# Altium PCB car_PCB.PcbDoc
Units mm, origin at the board's own origin, x right, y up, seen from the top; angles counter-clockwise.
Board outline 95 x 85 mm, 2 copper layers (Top Layer, Bottom Layer); 16 components, 24 nets, 116 pads, 31 vias.
Unrouted connection lines stored in the file: 53.
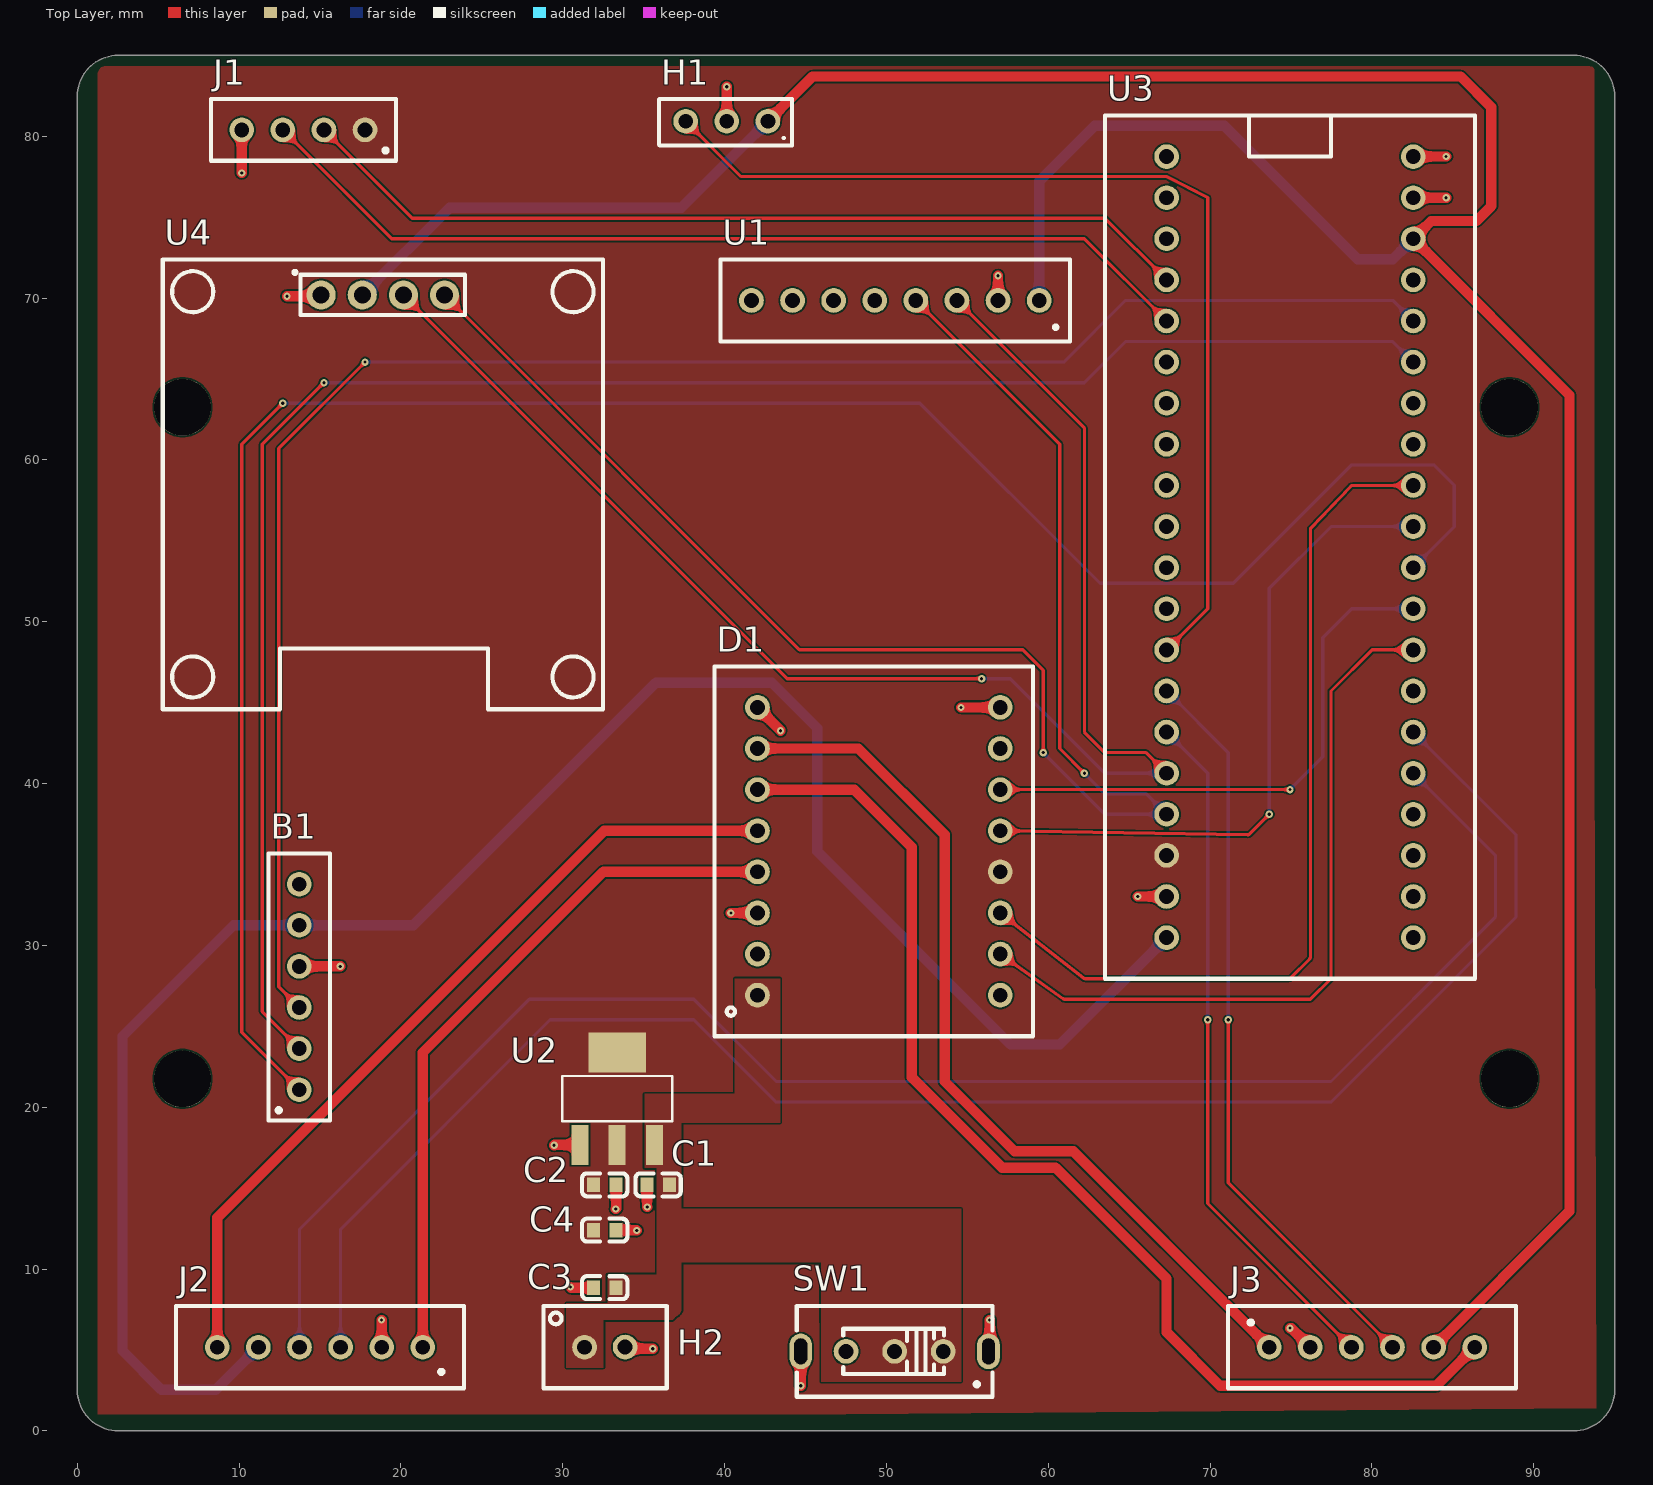
[diagram p0: Top Layer view]
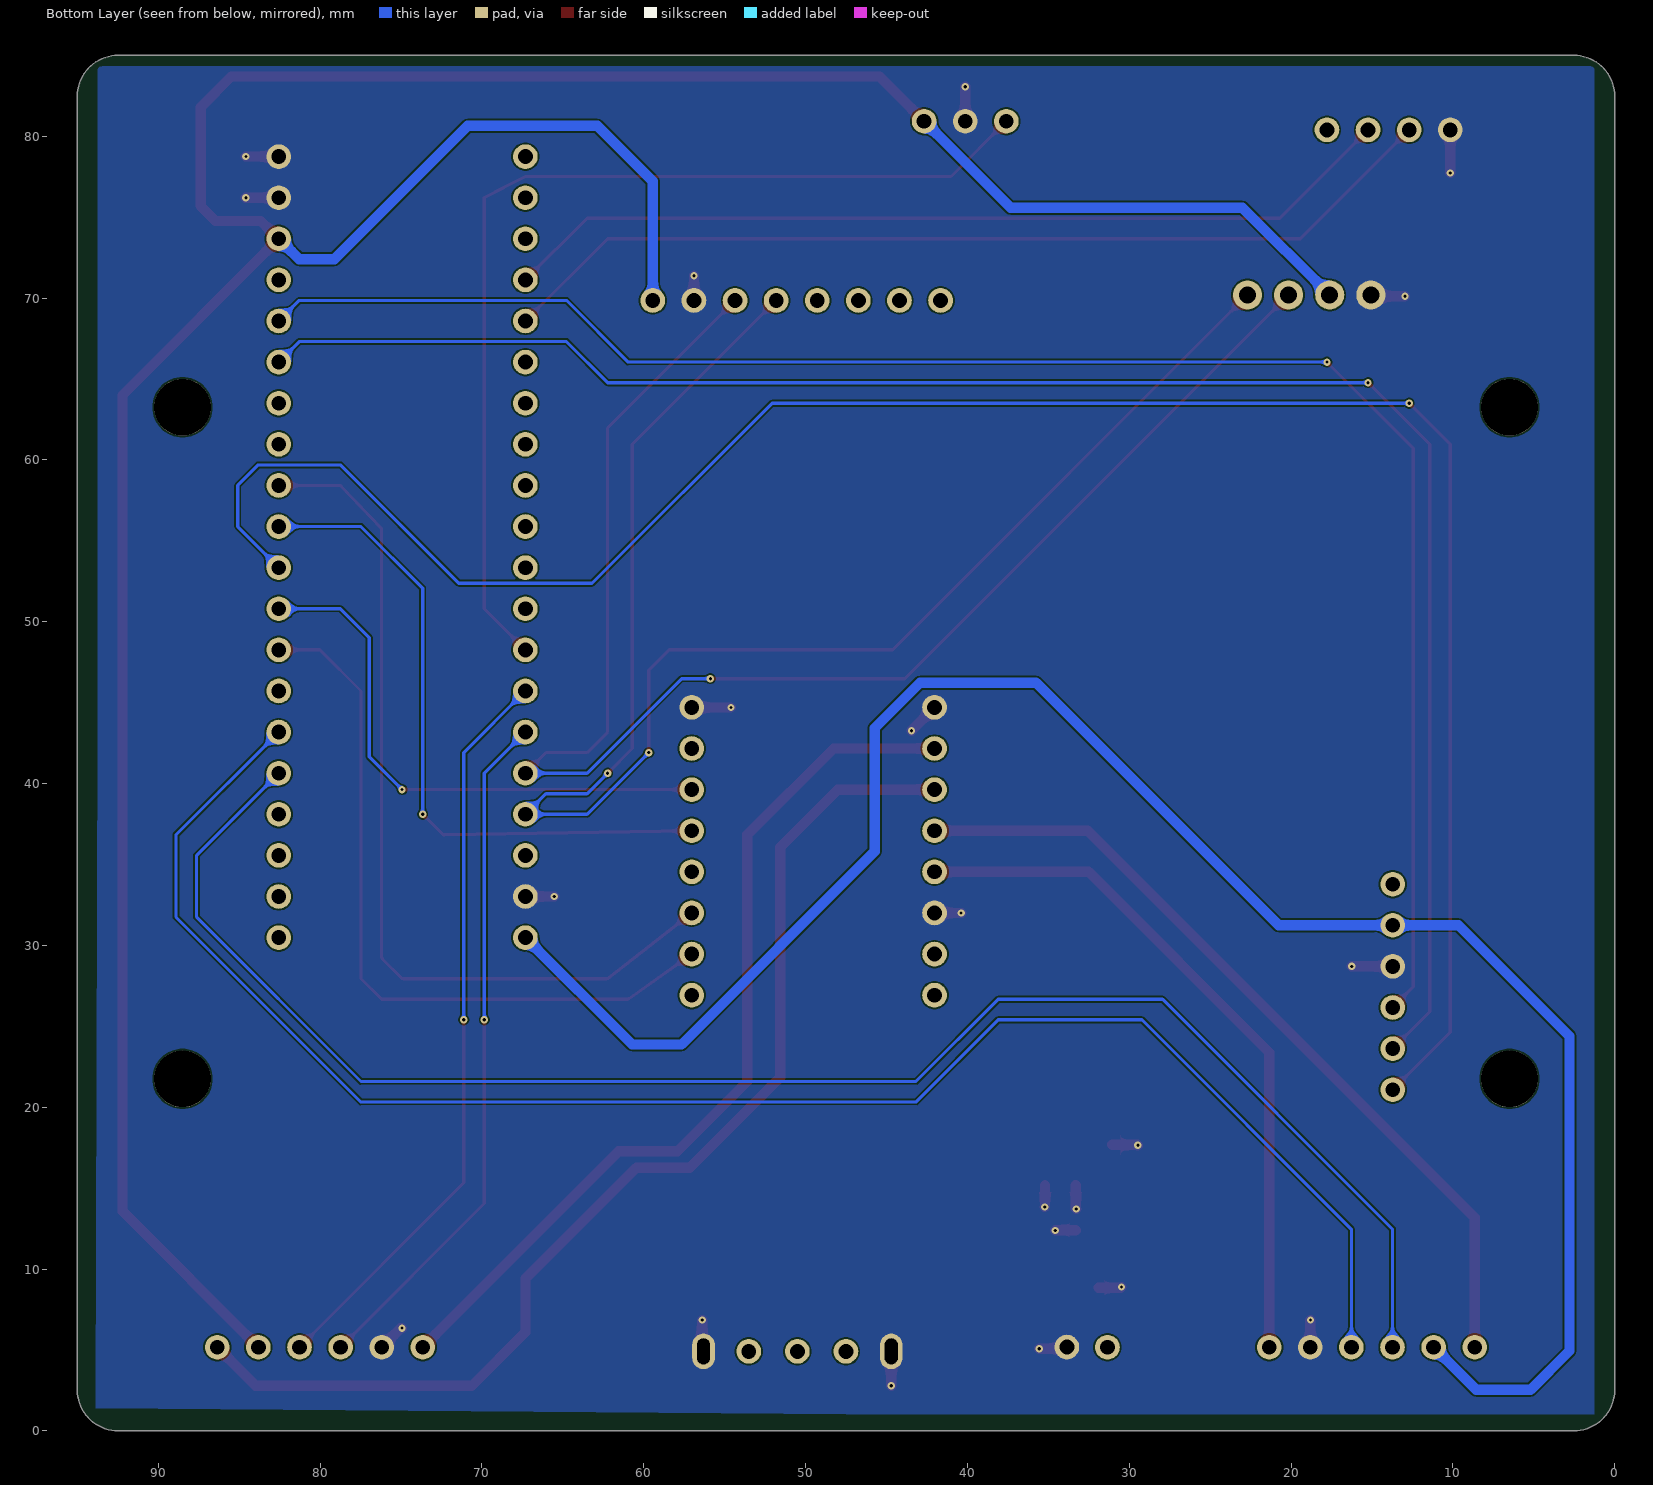
[diagram p1: Bottom Layer view, seen from below]

## Layer stack, top to bottom
Top Solder: solder mask 0.0102, Solder Resist, Dk 3.5
Top Layer: signal copper 0.0356
Dielectric 1: dielectric 0.32, FR-4, Dk 4.8
Bottom Layer: signal copper 0.0356
Bottom Solder: solder mask 0.0102, Solder Resist, Dk 3.5

## Board outline
0,2.54 0,82.46 cw(c2.54,82.46) 2.54,85 92.46,85 cw(c92.46,82.46) 95,82.46 95,2.54 cw(c92.46,2.54) 92.46,0 2.54,0 cw(c2.54,2.54)

## Design rules (kind name [scope] priority, off if disabled: settings)
Clearance PWR_Clearance [InNetClass('PWR')] p1: gap=0.102 ignorepadtopadclearanceinfootprint=FALSE
Clearance [All] p2: gap=0.102 ignorepadtopadclearanceinfootprint=FALSE
DiffPairsRouting [All] p1: maxlimit=1 minlimit=0.1 mostfreqgap=0.1 toplayer_minwidth=0.1 toplayer_maxwidth=1 toplayer_prefwidth=0.1 bottomlayer_minwidth=0.1 bottomlayer_maxwidth=1 bottomlayer_prefwidth=0.1 maxuncoupledlength=12.7
HoleSize [All] p1: absolutevalues=TRUE maxlimit=3.81 minlimit=0.025 maxpercent=80.000 minpercent=20.000
HoleToHoleClearance [All] p1: gap=0.102 allowstackedmicrovias=TRUE
PolygonConnect [All] p1: connectstyle=Direct reliefconductorwidth=0.254 reliefentries=4 polygonreliefangle="90 Angle" airgapwidth=0.254
RoutingVias [All] p1: holewidth=0.2 width=0.45 viastyle="Through Hole" minholewidth=0.2 minwidth=0.45 maxholewidth=1 maxwidth=2
SilkToSilkClearance [All] p1: silktosilkclearance=0.102
SilkToSolderMaskClearance [IsPad] p1: minsilkscreentomaskgap=0.102 clearancetoexposedcopper=TRUE
SolderMaskExpansion [All] p1: expansion=0.102 istentingtop=FALSE
Width BIG_POWER [InNetClass('BIG_POWER')] p1: maxlimit=8 minlimit=0.254 preferedwidth=0.889
Width PWR [InNetClass('PWR')] p2: maxlimit=2.5 minlimit=0.508 preferedwidth=0.635
Width [All] p3: maxlimit=2 minlimit=0.1 preferedwidth=0.2
25 further rules are at their usual default settings.

## Classes and differential pairs
net class BIG_POWER: VBAT
net class PWR: +3.3V +5V AO1 AO2 BO1 BO2 GND
component class car_schematic: B1 C1 C2 C3 C4 D1 H1 H2 J1 J2 J3 SW1 U1 U2 U4

## Components (designator, comment, footprint, x,y, rotation, side; value= is the part's Value field where it differs from the comment)
B1 "HC-05" HC-05_HEADER 13.716,27.432 r90 top
C1 "0.1uF" C0603 35.899,15.198 r0 top value=1uF
C2 "0.1uF" C0603 32.597,15.198 r0 top value=1uF
C3 "10uF" C0603 32.597,8.848 r0 top value=1uF
C4 "10uF" C0603 32.597,12.404 r0 top value=1uF
D1 "DRV8833" DRV8833_HEADER 49.53,35.814 r90 top
H1 "infrared" RISYM-001_HEADER 40.132,80.924 r180 top
H2 "HEADER_1X2" HEADER_1X2 32.597,5.175 r0 top
J1 "ultrasonic" HC-SR04_HEADER 13.97,80.391 r180 top
J2 "JGA25-370" JGA25-370_HEADER 15,5.171 r180 top
J3 "JGA25-370" JGA25-370_HEADER 80,5.171 r0 top
SW1 "SS-12F44-G5_C136718" SW-TH_SS-12F44-GX 50.504,4.911 r180 top
U1 "MPU-6050" MPU-6050_HEADER 50.546,69.85 r180 top
U2 "AMS1117-ADJ_C369939" SOT-223_L6.5-W3.5-P2.30-LS7.0-BR 33.359,20.532 r270 top
U3 "STM32F103C8T6_HEADER" STM32F103C8T6_HEADER 74.93,54.61 r270 top
U4 "HS96L03W2C03" OLED-TH_L27.8-W27.2-P2.54_C9900033791 18.881,70.19 r0 top

## Footprints (in the part's own frame and the unit in brackets; to place one, negate y for a bottom-side part, rotate by r counter-clockwise, add the part's x,y. Pads: shape width x height; smd on the part's side, far side on the other; paste and mask are expansions set on the pad)
C0603 [mm]
  rect 0.8x0.9 smd paste+0 mask+0.051: 1(-0.7,0) 2(0.7,0)
  silkscreen extent -1.41,-0.71 1.39,0.72
DRV8833_HEADER [mil] "电机驱动"
  round 60 hole 36 paste+0 mask+4: 1(-350,295.3) 2(-250,295.3) 3(-150,295.3) 4(-50,295.3) 5(50,295.3) 6(150,295.3) 7(250,295.3) 8(350,295.3) 9(350,-295.3) 10(250,-295.3) 11(150,-295.3) 12(50,-295.3) 13(-50,-295.3) 14(-150,-295.3) 15(-250,-295.3) 16(-350,-295.3)
  silkscreen extent -450,-375 450,400
HC-05_HEADER [mil] "蓝牙"
  round 60 hole 36 paste+0 mask+4: 1(-250,0) 2(-150,0) 3(-50,0) 4(50,0) 5(150,0) 6(250,0)
  silkscreen extent -325,-75 325,75
HC-SR04_HEADER [mil] "超声波模块"
  round 60 hole 36 paste+0 mask+4: 1(-150,0) 2(-50,0) 3(50,0) 4(150,0)
  silkscreen extent -225,-75 225,75
HEADER_1X2 [mil] "HEADER"
  round 60 hole 36 paste+0 mask+4: 1(-49.33,-0.14) 2(49.33,0.14)
  silkscreen extent -149,-100 151,100
JGA25-370_HEADER [mil] "直流减速电机"
  round 60 hole 36 paste+0 mask+4: 1(-250,0) 2(-150,0) 3(-50,0) 4(50,0) 5(150,0) 6(250,0)
  silkscreen extent -350,-100 350,100
MPU-6050_HEADER [mil]
  round 60 hole 36 paste+0 mask+4: 1(-350,0) 2(-250,0) 3(-150,0) 4(-50,0) 5(50,0) 6(150,0) 7(250,0) 8(350,0)
  silkscreen extent -425,-100 425,100
OLED-TH_L27.8-W27.2-P2.54_C9900033791 [mm]
  round 1.8 hole 1.05 paste+0 mask+0.05: 1(-3.81,0) 2(-1.27,0) 3(1.27,0) 4(3.81,0)
  silkscreen extent -13.6,-25.6 13.6,2.2
RISYM-001_HEADER [mil] "红外循迹"
  round 60 hole 36 paste+0 mask+4: 1(-100,0) 2(0,0) 3(100,0)
  silkscreen extent -159,-54 165,59
SOT-223_L6.5-W3.5-P2.30-LS7.0-BR [mm]
  rect 2.465x1.05 smd paste+0 mask+0.051: 1(2.858,-2.3) 2(2.857,0) 3(2.857,2.3)
  rect 2.465x3.54 smd paste+0 mask+0.051: 4(-2.857,0)
  silkscreen extent -1.4,-3.4 1.4,3.4
STM32F103C8T6_HEADER [mil]
  round 60 hole 36 paste+0 mask+4: 1(-950,300) 2(-850,300) 3(-750,300) 4(-650,300) 5(-550,300) 6(-450,300) 7(-350,300) 8(-250,300) 9(-150,300) 10(-50,300) 11(50,300) 12(150,300) 13(250,300) 14(350,300) 15(450,300) 16(550,300) 17(650,300) 18(750,300) 19(850,300) 20(950,300) 21(950,-300) 22(850,-300) 23(750,-300) 24(650,-300) 25(550,-300) 26(450,-300) 27(350,-300) 28(250,-300) 29(150,-300) 30(50,-300) 31(-50,-300) 32(-150,-300) 33(-250,-300) 34(-350,-300) 35(-450,-300) 36(-550,-300) 37(-650,-300) 38(-750,-300) 39(-850,-300) 40(-950,-300)
  silkscreen extent -1050,-450 1050,450
SW-TH_SS-12F44-GX [mil]
  round 60 hole 36 paste+0 mask+2: 1(-118.11,0) 2(0,0) 3(118.11,0)
  oval 55.12x86.61 hole 31.5 slot 62.99 at 90 deg paste+0 mask+2: 4(228.35,0) 5(-228.35,0)
  silkscreen extent -238,-110 238,110

## Part data
B1: "蓝牙模块 VCC接3.3"
C1 C2 C3 C4: library part C0603, JLCPCB Part Class="Basic Part", LCSC Part Name="1uF ±10% 50V", Manufacturer=SAMSUNG(三星), Manufacturer Part=CL10A105KB8NNNC, Temperature Coefficient=X5R, Tolerance=±10%, Voltage Rated=50V, Add into BOM=yes, Convert to PCB=yes, Datasheet=https://atta.szlcsc.com/upload/public/pdf/source/20160103/1457707679084.pdf, Device=CL10A105KB8NNNC, Name=1uF, Supplier=LCSC, Supplier Footprint=0603, Supplier Part=C15849, Symbol=CL10A105KB8NNNC
D1: "电机驱动"
H1: library part RISYM-001, "红外循迹模块"
J1: library part HC-SR04, "超声波模块 Pin Header"
J2 J3: "JGA25-370 直流减速电机"
SW1: "滑动开关G5", Current Rating (AC)=-, JLCPCB Part Class="Extended Part", LCSC Part Name="直插双档 滑动开关", Manufacturer=韩国韩荣, Manufacturer Part=SS-12F44-G5, Operating Temperature=-25℃~+70℃, Actuator Style=矩形柱状, Add into BOM=yes, Circuit=单刀双掷, Convert to PCB=yes, Current Rating (DC)=-, Datasheet=https://atta.szlcsc.com/upload/public/pdf/source/20171123/C136718_15114108132111137440.pdf, Device=SS-12F44-G5_C136718, Mechanical Life=5千次, Mounting Style=直插, Name=SS-12F44-G5, Pin Style=PC引脚, Supplier=LCSC, Supplier Footprint=插件, Supplier Part=C136718, Switch Height=11mm, Symbol=SS-12F44-G5, Voltage Rating (AC)=-, Voltage Rating (DC)=-
U1: "Pin Header", JLCPCB Part Class="Basic Part", Manufacturer="TDK InvenSense(应美盛)", Add into BOM=yes, Convert to PCB=yes, Datasheet=https://atta.szlcsc.com/upload/public/pdf/source/20140425/1457707046159.pdf, Device=MPU-6050, LCSC Part Name=MPU-6050, Manufacturer Part=MPU-6050, Name=MPU-6050, Supplier=LCSC, Supplier Footprint=QFN-24(4x4), Supplier Part=C24112, Symbol=MPU-6050_C24112
U2: "电源稳压芯片", Dropout Voltage=1.6V@(1A), JLCPCB Part Class="Extended Part", LCSC Part Name=AMS1117-ADJ, Manufacturer=KEXIN(科信), Maximum Input Voltage=18V, Output Current=1A, Output Voltage=1.2V~5V, Power Supply Rejection Ratio (PSRR)=70dB, Add into BOM=yes, Convert to PCB=yes, Datasheet=https://atta.szlcsc.com/upload/public/pdf/source/20210413/C369939_FEF4C4218FA2F17782ADF56797D6F897.pdf, Device=AMS1117-ADJ_C369939, Manufacturer Part=AMS1117-ADJ, Name=AMS1117-ADJ, Number of Outputs=1, Output Polarity=正, Output Type=可调, Supplier=LCSC, Supplier Footprint=SOT-223, Supplier Part=C369939, Symbol=AMS1117-ADJ_C369939
U3: "Pin Header"
U4: "I2C OLED 0.96", JLCPCB Part Class="Extended Part", LCSC Part Name=0.96寸OLED显示屏窄白光IIC, Manufacturer=HS(汉昇), Add into BOM=yes, Convert to PCB=yes, Device=HS96L03W2C03, Manufacturer Part=HS96L03W2C03, Name=HS96L03W2C03, Supplier=LCSC, Supplier Footprint=-, Supplier Part=C5248080, Symbol=HS96L03W2C03

## Free pads (board coordinates)
  round 3.5 hole 3.5 unplated: ""(6.5,21.75) ""(6.5,63.25) ""(88.5,21.75) ""(88.5,63.25)

## Via types
v1: diameter 0.45, hole 0.2, Top Layer to Bottom Layer, tented both sides, 31 vias

## Nets (pads, with @x,y where several pads share a name; then routed paths per layer and width w, separated by ;. In a path a pad name is that pad's centre, name@x,y a point inside that pad or via, vN(x,y) a via of type N, cw(c..) or ccw(c..) an arc to the next point about the centre after c; other vN are vias at no path point)
+3.3V: B1.5 H1.1 J2.5 J3.5 U1.1 U3.3 U3.21 U4.2 | length 320
  Top Layer w0.635: H1.1 45.441,83.693 85.471,83.693 87.376,81.788 87.376,75.683 86.45,74.757 83.647,74.757 U3.3 92.202,64.008 92.202,13.563 J3.5 ; J3.5@83.716,5.194 J3.5@83.81,5.194
  Bottom Layer w0.635: J2.5 8.559,2.54 5.198,2.54 2.794,4.944 2.794,24.384 9.652,31.242 B1.5 20.769,31.242 35.755,46.228 42.926,46.228 45.72,43.434 45.72,35.814 57.658,23.876 60.706,23.876 U3.21 U3.21@67.51,30.48 ; U4.2 23.004,75.584 37.331,75.584 H1.1 ; U1.1 59.436,77.216 62.865,80.645 70.866,80.645 79.121,72.39 81.28,72.39 U3.3
+5V: C2.1 C4.1 D1.13 J1.1 U2.2 U2.4 U3.23
A_SIG1: J2.3 U3.15 | length 106.2
  Bottom Layer w0.2: J2.3 16.27,12.46 29.21,25.4 38.1,25.4 43.18,20.32 77.47,20.32 88.9,31.75 88.9,36.83 U3.15
A_SIG2: J2.4 U3.16 | length 104.4
  Bottom Layer w0.2: J2.4 13.73,12.46 27.94,26.67 38.1,26.67 43.18,21.59 77.47,21.59 87.63,31.75 87.63,35.56 U3.16
Ain1: D1.14 U3.9 | length 55.1
  Top Layer w0.2: D1.14 62.176,27.982 ; 62.176,27.982 ccw(c62.299,28.14) 62.299,27.94 74.847,27.94 ccw(c74.847,28.14) 74.988,27.998 76.141,29.151 ccw(c76,29.293) 76.2,29.293 76.2,55.745 78.681,58.358 cw(c78.826,58.22) 78.826,58.42 U3.9
Ain2: D1.15 U3.13 | length 45.8
  Top Layer w0.2: D1.15 60.908,26.707 ccw(c61.024,26.87) 61.024,26.67 76.2,26.67 77.47,27.94 77.47,45.72 80.01,48.26 U3.13
AO1: D1.4 J2.1 | length 43.5
  Top Layer w0.635: J2.1 21.35,23.382 32.512,34.544 D1.4
AO2: D1.5 J2.6 | length 51.3
  Top Layer w0.635: J2.6 8.65,13.169 32.565,37.084 D1.5
B_SIG1: J3.3 U3.26 | length 42.7
  Top Layer w0.2: v1(69.85,25.4) 69.85,14.051 J3.3
  Bottom Layer w0.2: U3.26 69.85,40.64 v1(69.85,25.4)
B_SIG2: J3.4 U3.27 | length 46.7
  Top Layer w0.2: v1(71.12,25.4) 71.12,15.321 J3.4
  Bottom Layer w0.2: U3.27@67.558,45.472 U3.27 71.12,41.91 v1(71.12,25.4)
Bin1: D1.12 U3.10 | length 41.6
  Top Layer w0.2: D1.12 72.305,36.831 ; 72.306,36.831 ccw(c72.309,37.031) 72.45,36.89 v1(73.66,38.1)
  Bottom Layer w0.2: v1(73.66,38.1) 73.66,52.07 77.47,55.88 U3.10
Bin2: D1.11 U3.12 | length 35.2
  Top Layer w0.2: D1.11 v1(74.93,39.624)
  Bottom Layer w0.2: v1(74.93,39.624) 76.962,41.656 76.962,49.022 78.74,50.8 U3.12 82.033,50.455 81.982,50.422 U3.12@81.902,50.422
BlueTooth_RX: B1.2 U3.6 | length 112.6
  Top Layer w0.2: B1.2 11.43,25.908 11.43,60.96 v1(15.24,64.77)
  Bottom Layer w0.2: v1(15.24,64.77) 62.23,64.77 64.77,67.31 81.28,67.31 U3.6
BlueTooth_STATE: B1.1 U3.11 | length 131.6
  Top Layer w0.2: v1(12.7,63.5) 10.16,60.96 10.16,24.638 B1.1
  Bottom Layer w0.2: v1(12.7,63.5) 52.07,63.5 63.194,52.376 71.426,52.376 78.74,59.69 83.82,59.69 85.09,58.42 85.09,55.88 U3.11
BlueTooth_TX: B1.3 U3.5 | length 109.5
  Top Layer w0.2: B1.3 12.446,27.432 12.446,60.706 v1(17.78,66.04)
  Bottom Layer w0.2: v1(17.78,66.04) 60.96,66.04 64.77,69.85 81.28,69.85 U3.5
BO1: D1.7 J3.1 | length 55.9
  Top Layer w0.635: D1.7 48.26,42.164 53.594,36.83 53.594,21.59 57.912,17.272 61.549,17.272 J3.1
BO2: D1.6 J3.6 | length 70.8
  Top Layer w0.635: D1.6 48.006,39.624 51.562,36.068 51.562,21.844 57.15,16.256 60.452,16.256 67.31,9.398 67.31,6.096 70.612,2.794 83.973,2.794 J3.6
ECHO: J1.3 U3.36 | length 59.5
  Top Layer w0.2: J1.3 19.431,73.66 62.23,73.66 U3.36
GND: B1.4 C1.1 C2.2 C3.1 C4.2 D1.3 D1.8 D1.9 H1.2 H2.2 J1.4 J2.2 J3.2 SW1.4 SW1.5 U1.2 U2.1 U3.1 U3.2 U3.22 U4.1 | length 39.9
  Top Layer w0.635: v1(10.16,77.724) J1.4 ; v1(12.954,70.104) 14.985,70.104 U4.1 ; B1.4 v1(16.256,28.702) ; v1(18.796,6.858) 18.81,6.844 J2.2 ; v1(29.464,17.653) 29.486,17.675 U2.1 ; v1(30.48,8.89) 30.522,8.848 C3.1 ; v1(33.274,13.716) 33.297,13.739 C2.2 ; C4.2 34.543,12.404 v1(34.57,12.377) ; H2.2@33.782,5.11 H2.2 ccw(c33.948,5.178) 33.948,5.08 v1(35.56,5.08) ; C1.1 35.199,13.853 v1(35.215,13.838) ; H1.2 v1(40.132,83.054) ; v1(40.386,32.004) D1.3 ; D1.8 43.448,43.285 v1(43.448,43.261) ; v1@44.704,2.794 SW1.4 ; v1(54.61,44.704) D1.9 ; SW1.5 56.388,4.995 v1(56.388,6.858) ; U1.2 v1(56.896,71.374) ; v1(65.532,33.02) U3.22 ; v1(74.93,6.35) 75.011,6.35 J3.2 ; U3.2 v1(84.582,76.2) ; U3.1 v1(84.582,78.74)
  Bottom Layer w0.635: SW1.5@56.304,4.511 SW1.5
  other v1: 44.704,2.794
IIC_SCL: U1.3 U3.25 U4.3 | length 95.5
  Top Layer w0.2: U4.3 43.859,46.482 v1(55.88,46.482) ; U1.3 62.23,61.976 62.23,43.18 63.5,41.91 66.04,41.91 U3.25
  Bottom Layer w0.2: v1(55.88,46.482) 57.658,46.482 63.5,40.64 U3.25
IIC_SDA: U1.4 U3.24 U4.4 | length 100.5
  Top Layer w0.2: U4.4 44.621,48.26 58.42,48.26 59.69,46.99 v1(59.69,41.91) ; U1.4 60.706,60.96 60.706,42.164 v1(62.23,40.64)
  Bottom Layer w0.2: v1(59.69,41.91) 63.5,38.1 U3.24 66.04,39.37 63.5,39.37 v1(62.23,40.64)
Infrared_Out: H1.3 U3.28 | length 63
  Top Layer w0.2: H1.3 40.95,77.567 41.008,77.508 67.31,77.508 69.85,76.2 69.85,50.8 U3.28
TRIG: J1.2 U3.37 | length 55.9
  Top Layer w0.2: J1.2 20.701,74.93 63.5,74.93 U3.37
VBAT: C1.2 C3.2 D1.1 H2.1 SW1.1 SW1.2 U2.3
pads on no net: B1.6 D1.2 D1.10 D1.16 SW1.3 U1.5 U1.6 U1.7 U1.8 U3.4 U3.7 U3.8 U3.14 U3.17 U3.18 U3.19 U3.20 U3.29 U3.30 U3.31 U3.32 U3.33 U3.34 U3.35 U3.38 U3.39 U3.40

## Polygon pours and split planes (outlines as drawn)
+5V on Top Layer "+5V" (solid, remove dead copper, pour order 9): 1.27,83.82 1.27,42.926 1.27,1.016 47.498,1.016 93.855,1.395 93.726,42.926 93.726,84.074 ccw(c93.47,84.074) 93.47,84.33 1.776,84.326 ccw(c1.776,83.82)
VBAT on Top Layer "VBAT" (solid, remove dead copper, pour order 8): 40.64,27.94 40.64,20.828 35.052,20.828 35.052,19.05 35.052,16.256 35.814,16.256 35.814,14.732 35.814,9.652 34.29,9.652 32.766,9.652 32.766,7.874 30.226,7.874 30.226,4.826 30.226,4.064 30.226,3.912 30.446,3.912 32.512,3.912 32.512,6.858 34.798,6.858 35.814,6.858 36.756,6.858 ccw(c36.635,7.143) 36.92,7.022 ccw(c36.619,7.73) 37.327,7.43 37.327,10.414 45.963,10.414 45.974,3.048 54.61,3.048 54.61,13.716 37.327,13.716 37.327,15.494 37.327,19.05 43.434,19.05 43.434,23.622 43.434,27.94
GND on Bottom Layer "GND" (solid, remove dead copper, pour order 11): 1.27,84.074 1.27,42.926 1.27,1.016 47.498,1.016 93.855,1.395 93.726,42.926 93.726,84.074 ccw(c93.47,84.074) 93.47,84.33 1.522,84.326 ccw(c1.522,84.074)

## Silkscreen, mask and mechanical layers (free items; w line width, h text height)
Mechanical 1:
  the board outline again, w0.254
Drill Drawing:
  text ".legend" at 99.136,43.866 h1.52